# EAGLE board TurnON.v1.sp1 (EAGLE 5.11)
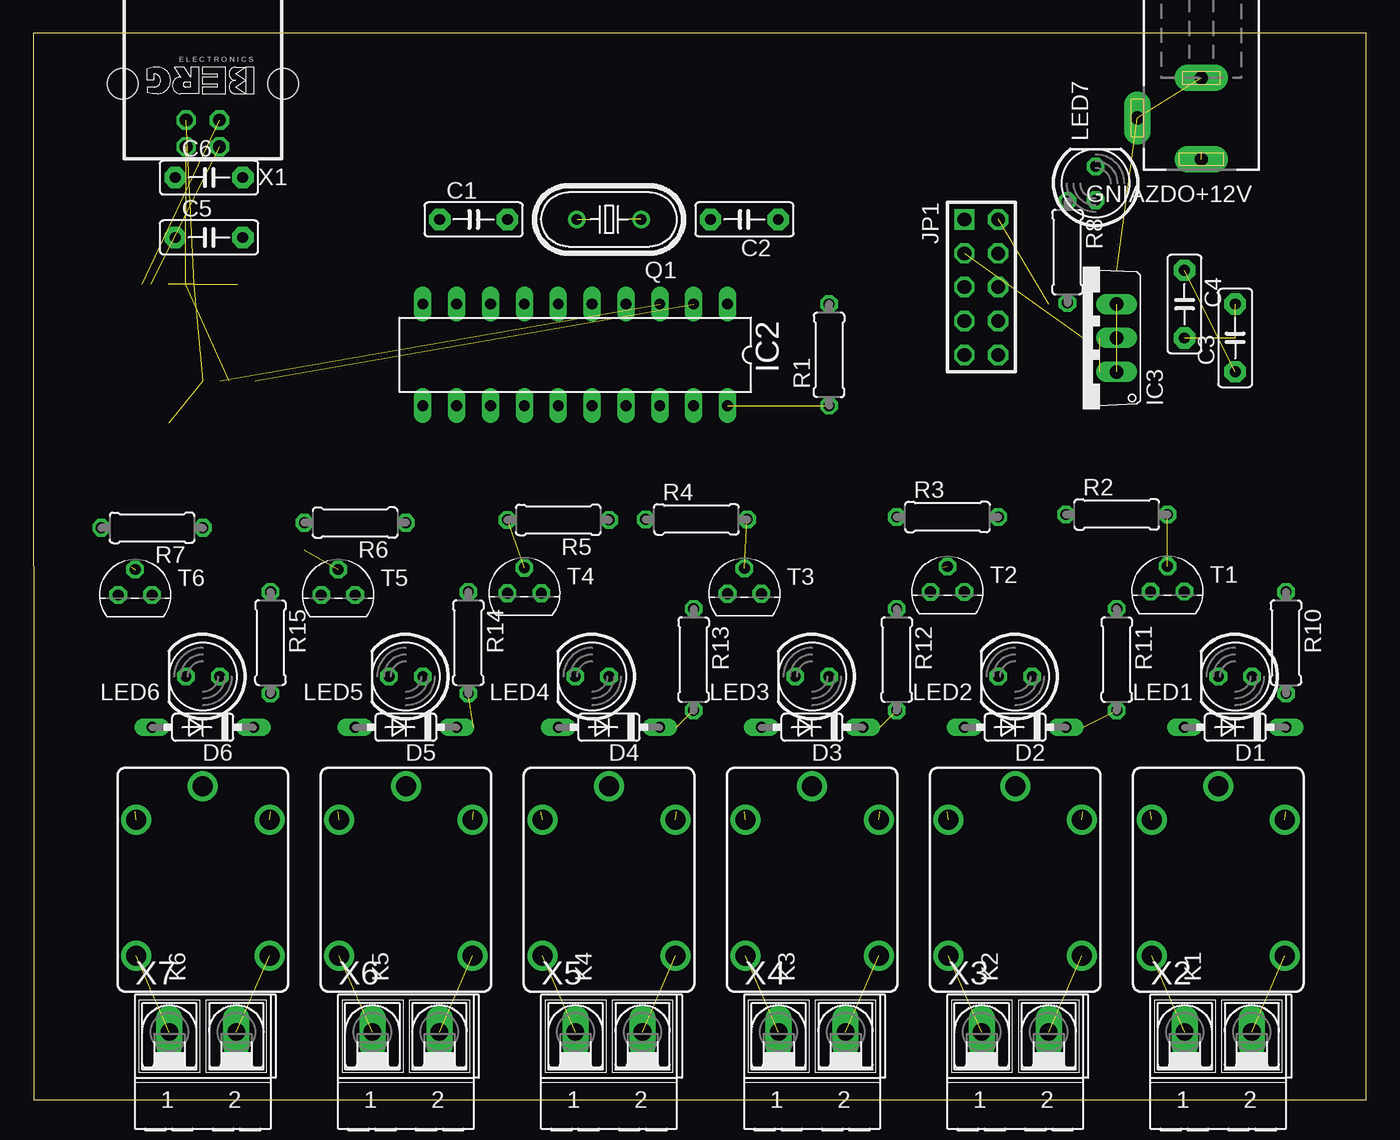
[diagram p0: board, top side]
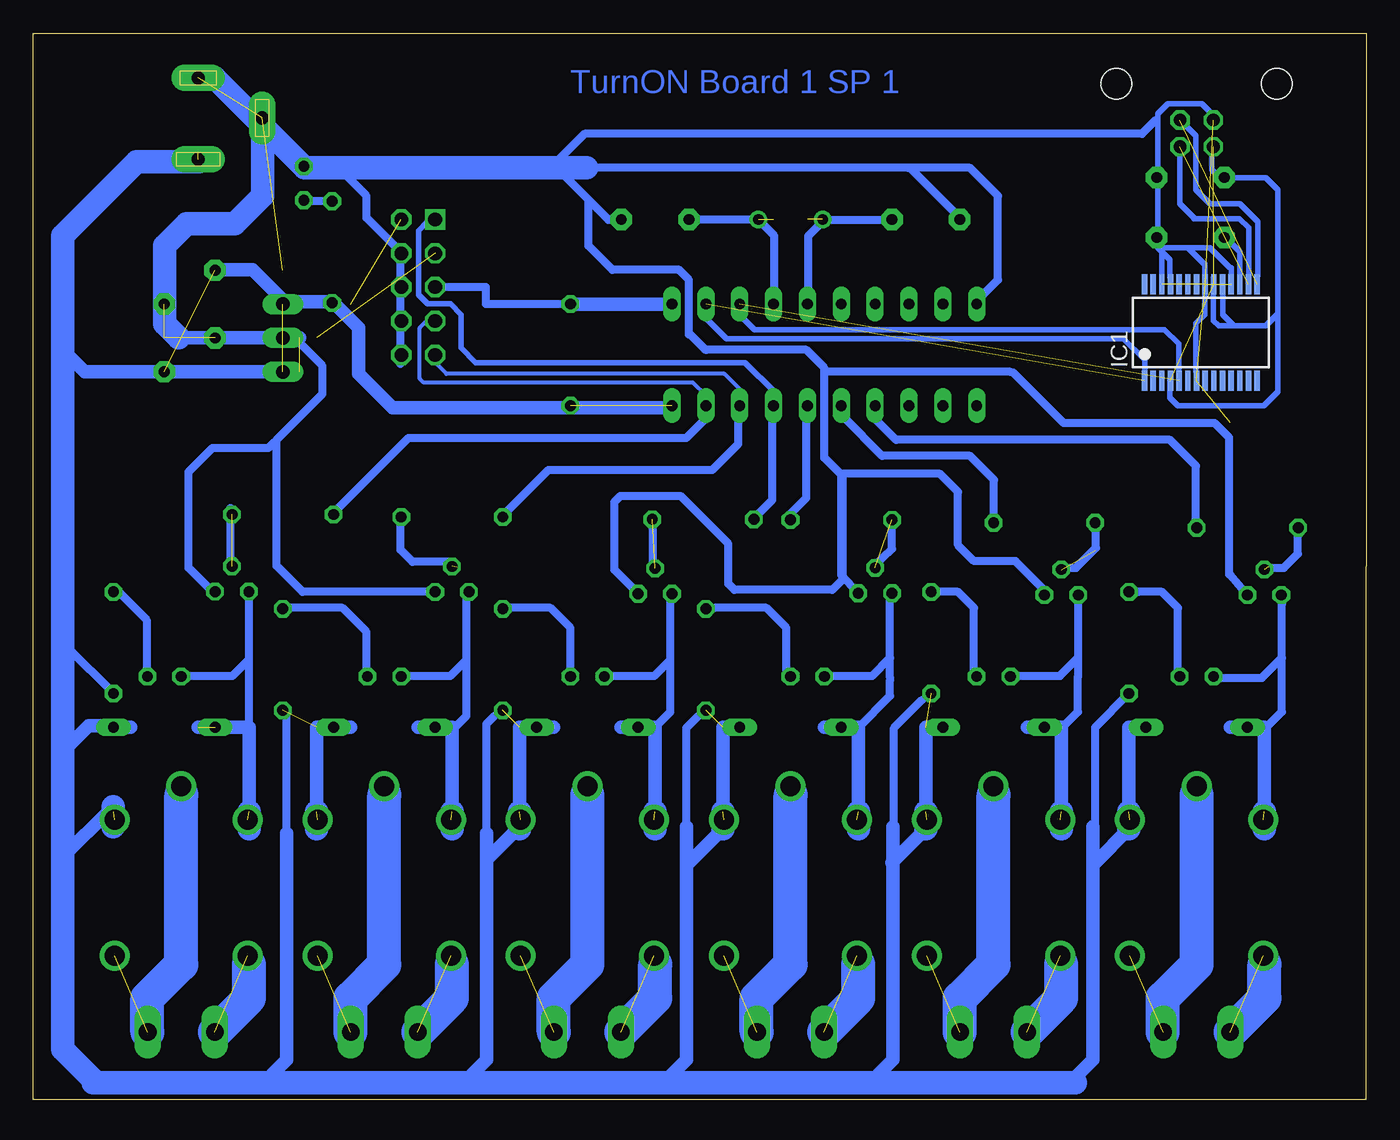
[diagram p1: board, bottom side, seen from below]

Size 100.02 x 80 mm. Coordinates in mm from the lower left corner, seen from the top.
Outline: 0.02,0 100.02,0 100.02,80 0,80 0.02,0
Copper layers (1*16): Top 0.035mm / dielectric 1.5mm / Bottom 0.035mm
Design rules "default": minimum track width 10mil, minimum drill 24mil, track to track 8mil, track to pad 8mil, pad to pad 8mil, via to via 8mil, smd to smd 8mil, copper to edge 40mil, drill to drill 8mil, minimum pad ring 10mil, minimum via ring 8mil, stop-mask expansion 4mil, vias tented up to drill 0mil, thermal gap 10mil

## Footprints (pad centres in the part's own frame; a part is rotated, then mirrored left to right if it is on the bottom)
C5B2.5 = drill 0.813 pad 1.6 octagon: 1 -2.54,0; 2 2.54,0
DO35-7 = drill 0.813 long: A 3.81,0; C -3.81,0
DCJ0202 = drill 1 pad 2 long: 1 0,3.1; 2 4.8,0; 3 0,-3
SSOP28 = smd 0.4 x 1.5: 1 -4.225,-3.625; 2 -3.575,-3.625; 3 -2.925,-3.625; 4 -2.275,-3.625; 5 -1.625,-3.625; 6 -0.975,-3.625; 7 -0.325,-3.625; 8 0.325,-3.625; 9 0.975,-3.625; 10 1.625,-3.625; 11 2.275,-3.625; 12 2.925,-3.625; 13 3.575,-3.625; 14 4.225,-3.625; 15 4.225,3.625; 16 3.575,3.625; 17 2.925,3.625; 18 2.275,3.625; 19 1.625,3.625; 20 0.975,3.625; 21 0.325,3.625; 22 -0.325,3.625; 23 -0.975,3.625; 24 -1.625,3.625; 25 -2.275,3.625; 26 -2.925,3.625; 27 -3.575,3.625; 28 -4.225,3.625
DIL20 = drill 0.813 long: 1 -11.43,-3.81; 2 -8.89,-3.81; 3 -6.35,-3.81; 4 -3.81,-3.81; 5 -1.27,-3.81; 6 1.27,-3.81; 7 3.81,-3.81; 8 6.35,-3.81; 9 8.89,-3.81; 10 11.43,-3.81; 11 11.43,3.81; 12 8.89,3.81; 13 6.35,3.81; 14 3.81,3.81; 15 1.27,3.81; 16 -1.27,3.81; 17 -3.81,3.81; 18 -6.35,3.81; 19 -8.89,3.81; 20 -11.43,3.81
TO220V = drill 1.016 long: 1 -2.54,-2.54; 2 0,-2.54; 3 2.54,-2.54
AVR-ISP-10 = drill 1.016 square: 1 -5.08,-1.27 | drill 1.016 octagon: 2 -5.08,1.27; 3 -2.54,-1.27; 4 -2.54,1.27; 5 0,-1.27; 6 0,1.27; 7 2.54,-1.27; 8 2.54,1.27; 9 5.08,-1.27; 10 5.08,1.27
CQ1 = drill 1.5 round: 1 4.5,-5; 2 4.5,5; C 7,0; NC -5.7,-5; NO -5.7,5
LED5MM = drill 0.813 octagon: A -1.27,0; K 1.27,0
HC49U70 = drill 0.813 round: 1 -2.413,0; 2 2.413,0
0207/7 = drill 0.813 octagon: 1 -3.81,0; 2 3.81,0
TO92 = drill 0.813 octagon: 1 1.27,0; 2 0,1.905; 3 -1.27,0
PN61729 = drill 0.95 octagon: 1 1.25,4.71; 2 -1.25,4.71; 3 -1.25,2.71; 4 1.25,2.71 | hole 2.3: -6.02,0; 6.02,0
AK500/2-H = drill 1.321 long: 1 -2.515,0; 2 2.515,0

## Placement (x,y rotation side)
C1  22pF  [C5B2.5]  33.04,66.04 0 top
C2  [C5B2.5]  53.36,66.04 180 top
C3  0.33uF  [C5B2.5]  90.19,57.15 90 top
C4  0.1uF  [C5B2.5]  86.38,59.69 270 top
C5  100nF  [C5B2.5]  13.18,64.69 0 top
C6  10nF  [C5B2.5]  13.18,69.19 0 top
D1  [DO35-7]  90.19,27.94 180 top
D2  [DO35-7]  73.68,27.94 180 top
D3  [DO35-7]  58.44,27.94 180 top
D4  [DO35-7]  43.2,27.94 180 top
D5  [DO35-7]  27.96,27.94 180 top
D6  [DO35-7]  12.72,27.94 180 top
GNIAZDO+12V  DCJ0202  [DCJ0202]  87.65,73.66 180 top
IC1  FT232RL  [SSOP28]  12.41,57.56 0 bottom
IC2  ATTiny 2313  [DIL20]  40.66,55.88 180 top
IC3  7805TV  [TO220V]  78.76,57.15 90 top
JP1  AVR-ISP-10  [AVR-ISP-10]  71.14,60.96 270 top
K1  CQ1-12V  [CQ1]  88.92,16.51 90 top
K2  CQ1-12V  [CQ1]  73.68,16.51 90 top
K3  CQ1-12V  [CQ1]  58.44,16.51 90 top
K4  CQ1-12V  [CQ1]  43.2,16.51 90 top
K5  CQ1-12V  [CQ1]  27.96,16.51 90 top
K6  CQ1-12V  [CQ1]  12.72,16.51 90 top
LED1  [LED5MM]  90.19,31.75 180 top
LED2  [LED5MM]  73.68,31.75 180 top
LED3  [LED5MM]  58.44,31.75 180 top
LED4  [LED5MM]  41.93,31.75 180 top
LED5  [LED5MM]  27.96,31.75 180 top
LED6  [LED5MM]  12.72,31.75 180 top
LED7  [LED5MM]  79.72,68.75 90 top
Q1  10MHz  [HC49U70]  43.2,66.04 180 top
R1  10k  [0207/7]  59.71,55.88 90 top
R2  1k  [0207/7]  81.3,43.91 0 top
R3  1k  [0207/7]  68.6,43.72 0 top
R4  1k  [0207/7]  49.76,43.54 0 top
R5  1k  [0207/7]  39.39,43.5 180 top
R6  1k  [0207/7]  24.15,43.29 180 top
R7  1k  [0207/7]  8.91,42.91 180 top
R8  150  [0207/7]  77.6,63.59 270 top
R10  1k  [0207/7]  94,34.29 270 top
R11  1k  [0207/7]  81.3,33.02 270 top
R12  1k  [0207/7]  64.79,33.02 270 top
R13  1k  [0207/7]  49.55,33.02 270 top
R14  1k  [0207/7]  32.64,34.29 270 top
R15  1k  [0207/7]  17.8,34.29 270 top
T1  BC337  [TO92]  85.11,38.12 0 top
T2  BC337  [TO92]  68.6,38.1 0 top
T3  BC337  [TO92]  53.36,37.96 0 top
T4  BC337  [TO92]  36.85,38 0 top
T5  BC337  [TO92]  22.88,37.87 0 top
T6  BC337  [TO92]  7.64,37.87 0 top
X1  [PN61729]  12.72,76.2 180 top
X2  [AK500/2-H]  88.92,5.08 0 top
X3  [AK500/2-H]  73.68,5.08 0 top
X4  [AK500/2-H]  58.44,5.08 0 top
X5  [AK500/2-H]  43.2,5.08 0 top
X6  [AK500/2-H]  27.96,5.08 0 top
X7  [AK500/2-H]  12.72,5.08 0 top

## Library data of the parts
C1-C6 = capacitor-wima
D1-D6 = diode
GNIAZDO+12V = con-jack; OC_FARNELL: unknown; OC_NEWARK: unknown
IC1 = ftdichip; MPN: FT232RL; OC_FARNELL: 1146032; OC_NEWARK: 91K9918
IC2 = atmel; OC_FARNELL: unknown; OC_NEWARK: unknown
IC3 = linear
JP1 = atmel-isp
K1-K6 = relay; OC_FARNELL: unknown; OC_NEWARK: unknown
LED1-LED7 = led
Q1 = crystal; OC_FARNELL: unknown; OC_NEWARK: unknown
R1-R8 R10-R15 = rcl
T1-T6 = transistor
X1 = con-berg; OC_FARNELL: unknown; OC_NEWARK: unknown
X2-X7 = con-ptr500; OC_FARNELL: unknown; OC_NEWARK: unknown

## Nets
N$1: IC2.1 JP1.5 R1.2
N$2: IC1.15 X1.3
N$3: IC1.16 X1.2
N$4: Q1.1
N$5: Q1.2
N$6: IC1.5 IC2.3
N$7: IC1.1 IC2.2
N$8: R2.2 T1.2
N$9: JP1.4
N$10: JP1.6
N$11: JP1.8
N$13: T2.2
N$14: R4.2 T3.2
N$19: R5.2 T4.2
N$22: K1.NO X2.1
N$24: T5.2
N$26: K1.NC X2.2
N$27: K2.NO X3.1
N$34: K2.NC X3.2
N$35: K3.NO X4.1
N$42: K3.NC X4.2
N$43: K4.NC X5.2
N$44: IC1.4 IC1.20 X1.1
N$45: K4.NO X5.1
N$46: K5.NC X6.2
N$47: K5.NO X6.1
N$48: K6.NC X7.2
N$49: K6.NO X7.1
N$51: D1.A K1.2 T1.3
N$64: D3.A K3.2
N$66: D5.A K5.2
N$67: D6.A K6.2
S$19: R10.2
S$23: D2.C K2.1 R11.2
S$25: R15.2
S$26: D5.C K5.1 R14.2
S$27: D4.C K4.1 R13.2
S$28: D3.C K3.1 R12.2
S$33: K1.1
S$34: D6.C K6.1
S$38: D1.C
S$41: T5.3
S$43: D4.A K4.2
S$47: D2.A K2.2
S$55: T6.1
S$56: IC1.7 IC1.18 IC1.21 IC1.25 IC1.26 X1.4
S$63: T6.2
S$72: T4.1
S$79: JP1.3
S$82: IC2.20 R1.1
S$83: JP1.2
S$85: C3.1 C4.1
S$86: IC3.1 IC3.3
S$88: C3.2 C4.2
S$90: IC3.2
S$99: GNIAZDO+12V.1
VCC: GNIAZDO+12V.2 GNIAZDO+12V.3

## Tracks (layer width: path | path; a pad name or v marks a point on that pad's centre or on a via)
N$1
  Bottom 0.61: JP1.5 66.06,60.96 66.06,59.69 R1.2
  Bottom 1.016: IC2.1 R1.2
N$2  (1 unrouted)
N$3  (1 unrouted)
N$4  (1 unrouted)
N$5  (1 unrouted)
N$6  (1 unrouted)
N$7  (1 unrouted)
N$8  (1 unrouted)
N$13  (1 unrouted)
N$14  (1 unrouted)
N$19  (1 unrouted)
N$22  (1 unrouted)
N$24  (1 unrouted)
N$26  (1 unrouted)
N$27  (1 unrouted)
N$34  (1 unrouted)
N$35  (1 unrouted)
N$42  (1 unrouted)
N$43  (1 unrouted)
N$44  (2 unrouted)
N$45  (1 unrouted)
N$46  (1 unrouted)
N$47  (1 unrouted)
N$48  (1 unrouted)
N$49  (1 unrouted)
N$51  (2 unrouted)
  Bottom 0.61: 83.84,27.94 T1.3
  Bottom 1.016: 87.65,27.94 83.84,27.94 83.84,21.59
  Bottom 1.778: 83.84,21.59 83.84,20.32
N$64  (1 unrouted)
  Bottom 1.016: 55.9,27.94 D3.A 53.36,27.94 53.36,21.59
  Bottom 1.778: 53.36,21.59 53.36,20.32
N$66  (1 unrouted)
  Bottom 1.016: 25.42,27.94 D5.A 22.88,27.94 22.88,21.59
  Bottom 1.778: 22.88,21.59 22.88,20.32
N$67  (1 unrouted)
  Bottom 1.016: 10.18,27.94 D6.A 7.64,27.94 7.64,20.32
  Bottom 1.778: 7.64,21.59 7.64,20.32
N$68
  Bottom 0.61: 35.58,43.32 35.58,41.3 36.92,40.05
N$69
  Bottom 0.61: 85.22,39.65 85.22,44.4
N$74
  Bottom 0.406: 49.62,59.7 49.62,58.7 48.02,57.1 18.22,57.1 16.62,55.5 16.62,53.8
S$1
  Bottom 0.406: 9.47,61.8 9.47,63.6 10.37,64.5
S$2
  Bottom 0.406: 14.72,54 14.72,52.65 14.12,52.05 7.67,52.05 6.62,53.1 6.62,68.25 7.52,69.15 10.97,69.15 11.57,69.75 11.57,70.8
S$3
  Bottom 0.406: 13.97,70.95 13.97,67.2 12.92,66.15
S$4
  Bottom 0.61: 77.72,67.4 79.82,67.4
S$5
  Bottom 0.61: 15.77,73.5 16.82,72.45 58.67,72.45 61.07,70.05
S$6
  Bottom 1.016: 81.62,57.15 88.97,57.15
S$7
  Bottom 2.54: 10.18,5.08 7.64,7.62 7.64,10.16
S$8
  Bottom 2.54: 25.42,5.08 22.88,7.62 22.88,10.16
S$9
  Bottom 2.54: 15.26,5.08 15.26,7.62 12.72,10.16 12.72,22.86
S$10
  Bottom 2.54: 30.5,5.08 30.5,7.62 27.96,10.16 27.96,22.86
S$11
  Bottom 2.54: 45.74,5.08 45.74,7.62 43.2,10.16 43.2,22.86
S$12
  Bottom 2.54: 60.98,5.08 60.98,7.62 58.44,10.16 58.44,22.86
S$13
  Bottom 2.54: 76.22,5.08 76.22,7.62 73.68,10.16 73.68,22.86
S$14
  Bottom 2.54: 91.46,5.08 91.46,7.62 88.92,10.16 88.92,22.86
S$15
  Bottom 2.54: 40.66,5.08 38.12,7.62 38.12,10.16
S$16
  Bottom 2.54: 55.9,5.08 53.36,7.62 53.36,10.16
S$17
  Bottom 2.54: 71.14,5.08 68.6,7.62 68.6,10.16
S$18
  Bottom 2.54: 86.38,5.08 83.84,7.62 83.84,10.16
S$19
  Bottom 0.61: 97.52,34.5 97.52,34 R10.2
S$20
  Bottom 0.61: 93.62,38.1 91.52,36 91.52,32.1
S$21
  Bottom 1.778: 21.84,1.27 95.51,1.27
S$22
  Bottom 1.778: 97.82,20.6 97.82,3.8 95.42,1.4
S$23  (2 unrouted)
  Bottom 1.016: 76.22,27.94 D2.C 78.76,27.94 78.76,21.59
  Bottom 1.778: 78.76,21.59 78.76,20.32
S$24
  Bottom 0.61: 81.02,19.5 81.02,28.95
  Bottom 1.016: 82.02,2 81.02,3 81.02,19.5 81.02,20
S$25
  Bottom 0.61: 20.34,20.32 20.34,27.94 R15.2
S$26  (2 unrouted)
  Bottom 1.016: D5.C 33.04,27.94 33.04,21.59 | 35.58,17.78 33.04,20.32
  Bottom 1.778: 33.04,21.59 33.04,20.32
S$27  (2 unrouted)
  Bottom 1.016: D4.C 48.28,27.94 48.28,21.59 | 50.82,17.78 48.28,20.32
  Bottom 1.778: 48.28,21.59 48.28,20.32
S$28  (2 unrouted)
  Bottom 1.016: 60.98,27.94 D3.C 63.52,27.94 63.52,20.32
  Bottom 1.778: 63.52,21.59 63.52,20.32
S$29
  Bottom 1.016: 66.02,18 66.02,20 | 66.02,18 64.02,20 | 67.02,2 66.02,3 66.02,18
S$30
  Bottom 1.016: 52.52,1.5 51.02,3 51.02,20.5
S$31
  Bottom 1.016: 36.52,2 35.52,3 35.52,20.5
S$32
  Bottom 1.016: 22.02,1.5 20.52,3 20.52,20.5
S$33  (1 unrouted)
S$34  (1 unrouted)
  Bottom 1.016: D6.C 17.8,27.94 17.8,21.59 | 20.34,17.78 17.8,20.32
  Bottom 1.778: 17.8,21.59 17.8,20.32
S$35
  Bottom 1.016: 98.02,18 94.02,22
  Bottom 1.778: 94.02,20.5 94.02,22
S$36
  Bottom 0.61: 35.42,20.7 35.42,27.9 33.32,30
S$37
  Bottom 0.61: 51.02,20.7 51.02,27.9 50.12,28.8
S$38
  Bottom 1.016: 92.73,27.94 D1.C 94,27.98
S$39
  Bottom 0.61: 26.42,31.8 22.97,31.8 21.62,33.15
S$40
  Bottom 0.61: 7.52,27.9 6.32,29.1 6.32,33.15 | 6.32,33.15 6.32,37.2 | 11.27,31.65 7.82,31.65 6.32,33.15
S$41
  Bottom 0.61: 21.61,31.75 T5.3
S$42
  Bottom 0.61: 22.82,27.9 21.62,29.1 21.62,31.8
S$43  (1 unrouted)
  Bottom 0.61: 38.12,27.9 35.72,30.3 35.72,31.5
  Bottom 1.016: 40.66,27.94 D4.A 38.12,27.94 38.12,27.9 38.12,21.59
  Bottom 1.778: 38.12,21.59 38.12,20.32
S$44
  Bottom 0.61: 52.22,31.95 52.22,33 | 52.22,33 52.22,37.5 | 56.87,31.8 53.42,31.8 52.22,33
S$45
  Bottom 0.61: 88.67,31.8 85.07,31.8 83.87,33
S$46
  Bottom 0.61: 66.02,20.1 66.02,28.2 65.42,28.8
S$47  (1 unrouted)
  Bottom 1.016: 71.14,27.94 D2.A 68.6,27.94 68.6,21.59
  Bottom 1.778: 68.6,21.59 68.6,20.32
S$48
  Bottom 0.61: 67.52,33 67.52,28.8 68.42,27.9 | 67.52,33 67.52,37.65 | 72.02,31.8 68.72,31.8 67.52,33
S$49
  Bottom 0.61: 27.92,43.65 27.92,46.5 29.72,48.3 36.32,48.3 39.17,51.15
S$50
  Bottom 0.61: 14.12,32.1 14.12,36.9 15.32,38.1 17.12,38.1
S$51
  Bottom 0.61: 29.42,32.1 29.42,36.9 30.62,38.1 32.42,38.1
S$52
  Bottom 0.61: 43.52,31.8 43.52,35.4 45.02,36.9 48.92,36.9
S$53
  Bottom 0.61: 59.72,31.8 59.72,35.4 61.22,36.9 64.22,36.9
S$54
  Bottom 0.61: 75.02,32.1 75.02,35.1 76.82,36.9 80.72,36.9
S$55
  Bottom 0.61: T6.1 10.18,39.37
S$56  (6 unrouted)
S$57
  Bottom 0.61: 10.28,39.42 10.28,49.68 11.36,50.76 22.7,50.76 26.48,54.54
S$59
  Bottom 0.406: 14.06,54 14.06,56.7 15.14,57.78 45.92,57.78 47,58.86
S$60
  Bottom 0.61: 55.82,66 56.87,66 58.37,67.5 | 58.37,67.5 60.17,69.3 | 58.37,67.5 58.37,64.05 56.57,62.25 51.62,62.25
S$61
  Bottom 0.61: 12.77,43.35 12.77,47.55 14.72,49.5 35.27,49.5 36.77,51
S$62
  Bottom 0.61: 22.82,39.9 21.77,39.9 20.27,41.4 20.27,43.2 20.12,43.35
S$63  (1 unrouted)
S$64
  Bottom 0.61: 7.67,39.9 6.17,39.9 5.12,40.95 5.12,42.3
S$66
  Bottom 0.61: 53.42,27.9 52.22,29.1 52.22,31.8
S$67
  Bottom 0.61: 35.72,31.65 35.72,33.15 | 35.72,33.15 35.72,38.1 | 40.37,31.8 37.07,31.8 35.72,33.15
S$68
  Bottom 0.61: 26.69,54.61 40.66,54.61
S$69
  Bottom 1.016: 94.52,28.05 95.87,28.05 97.37,26.55
S$70
  Bottom 0.61: 68.57,40.35 71.57,40.35 72.47,41.25 72.47,43.35
S$71
  Bottom 0.61: 53.57,43.05 53.57,40.2
S$72
  Bottom 0.61: 39.39,46.99 39.39,39.37 T4.1
S$73
  Bottom 0.61: 43.22,43.95 42.02,45.15 42.02,51.45
S$74
  Bottom 0.61: 45.92,43.65 44.57,45 44.57,51.3
S$75
  Bottom 1.778: 97.81,20.32 97.81,64.75
S$76
  Bottom 1.016: 98.12,56.55 96.17,54.6 80.42,54.6
S$77
  Bottom 0.61: 80.27,57 78.32,55.05 78.32,52.95 81.77,49.5 81.77,40.05 79.82,38.1 70.37,38.1
S$78
  Bottom 0.61: 86.57,38.1 88.37,39.9 88.37,47.1 86.57,48.9 82.37,48.9 81.92,49.35
S$79  (1 unrouted)
S$80
  Bottom 0.61: 64.82,43.8 61.37,47.25 49.07,47.25 47.12,49.2 47.12,51.3
S$81
  Bottom 0.61: 77.42,44.1 71.87,49.65 51.02,49.65 49.52,51.15
S$82  (1 unrouted)
S$83  (1 unrouted)
S$84
  Bottom 1.016: 52.07,51.9 73.07,51.9 75.62,54.45 75.62,57.9 77.57,59.85 81.17,59.85 81.32,60
S$85  (1 unrouted)
S$86  (1 unrouted)
S$87
  Bottom 1.016: 81.02,59.7 83.57,62.25 86.57,62.25
S$88  (2 unrouted)
S$89
  Bottom 0.61: 54.77,38.1 56.42,39.75 56.42,44.85 55.97,45.3 51.62,45.3
S$90  (1 unrouted)
  Bottom 1.016: 80.03,57.15 IC3.2
S$91
  Bottom 1.778: 87.62,70.35 92.27,70.35 97.82,64.8
S$92
  Bottom 0.305: 49.52,52.8 50.52,53.8 70.72,53.8 71.02,54.1 71.02,57.9 70.42,58.5 70.32,58.5
S$93
  Bottom 0.305: 46.82,53.1 48.17,54.45 69.02,54.45 69.77,55.2 69.77,55.5
S$94
  Bottom 0.406: 44.42,53.1 46.62,55.3 66.82,55.3 67.92,56.4 67.92,58.9 68.72,59.7 70.42,59.7 71.12,60.4 71.12,65.2 70.42,65.9
S$95
  Bottom 0.61: 72.47,55.2 72.47,63.6 75.02,66.15 75.02,67.8 76.82,69.6
S$96
  Bottom 0.61: 44.42,59.85 44.42,64.8 45.62,66 50.72,66
S$97
  Bottom 0.61: 41.87,60.6 41.87,64.8 40.67,66 36.17,66
S$98
  Bottom 0.61: 29.42,59.7 27.62,61.5 27.62,67.8 29.72,69.9 34.22,69.9 | 30.47,66.15 34.22,69.9 | 34.22,69.9 34.37,69.9 59.57,69.9
  Bottom 1.778: 89.12,57.15 90.17,58.2 90.17,64.05 88.52,65.7 84.92,65.7 82.82,67.8 82.82,73.05 | 82.82,73.05 86.42,76.65 | 58.52,69.9 59.57,69.9 79.67,69.9 82.82,73.05
S$99  (1 unrouted)
S$100
  Bottom 0.61: 49.52,56.25 42.02,56.25 40.67,54.9
S$101
  Bottom 0.61: 50.82,57.45 50.82,61.3 50.82,61.35 50.82,61.5 51.62,62.3
S$102
  Bottom 0.61: 50.82,57.4 50.72,57.4 49.62,56.3
S$103
  Bottom 0.406: 11.47,61.65 11.47,58.45 11.07,58.05 9.92,58.05 | 10.77,61.35 10.77,58.9 9.92,58.05 | 9.92,58.05 7.52,58.05 6.62,58.95
S$104
  Bottom 0.406: 10.12,61.6 10.12,62.4
S$105
  Bottom 0.61: 24.12,37.8 24.12,38.2 26.32,40.4 29.42,40.4 30.62,41.6 30.62,45.6 31.97,46.95 39.47,46.95 | 51.47,45.3 47.87,41.7 47.87,38.7 47.42,38.25 40.07,38.25 39.32,39 39.32,46.8 39.47,46.95 | 39.47,46.95 40.67,48.15 40.67,54.75
S$106
  Bottom 0.406: 12.92,66.1 9.52,66.1 8.82,65.4 8.82,61.7
S$107
  Bottom 0.406: 11.42,73.8 12.32,74.7 14.87,74.7 15.62,73.95 15.62,63.9 15.32,63.6 | 15.32,63.6 15.32,61.7 | 15.32,63.6 14.72,63 14.72,61.7
S$108
  Bottom 0.406: 13.37,63.9 15.47,63.9 | 12.17,62.7 13.37,63.9 | 13.37,63.9 11.72,63.9 10.22,62.4
S$109
  Bottom 0.406: 13.52,73.05 12.77,72.3 12.77,68.25 11.72,67.2 9.47,67.2 8.12,65.85 8.12,61.8
S$110
  Bottom 0.406: 12.12,62.7 12.12,58.9 12.77,58.25 12.77,54.6
VCC  (2 unrouted)

## Text on the board
Bottom: TurnON Board 1 SP 1